# Altium PCB Main.PcbDoc
Units mm, origin at the board's own origin, x right, y up, seen from the top; angles counter-clockwise.
Board outline 16 x 14 mm, 2 copper layers (Top Layer, Bottom Layer); 6 components, 5 nets, 21 pads, 4 vias.
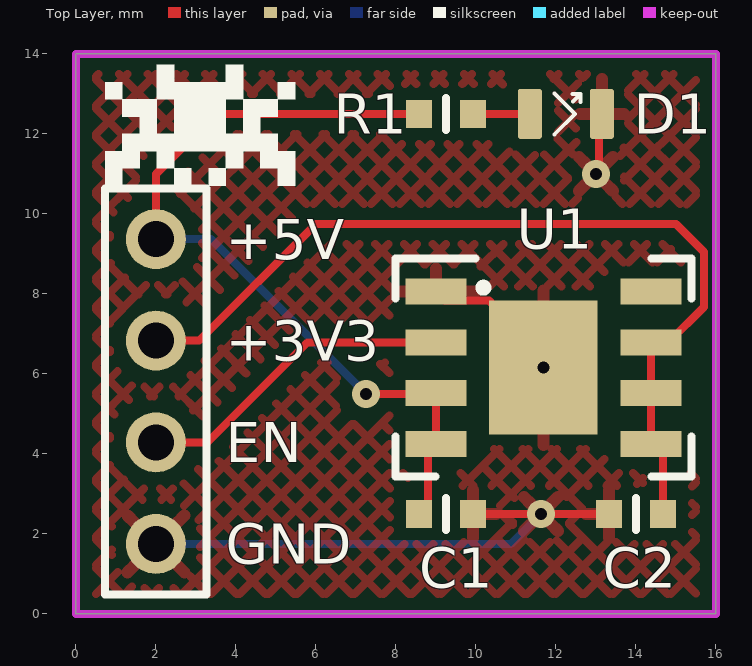
[diagram p0: Top Layer view]
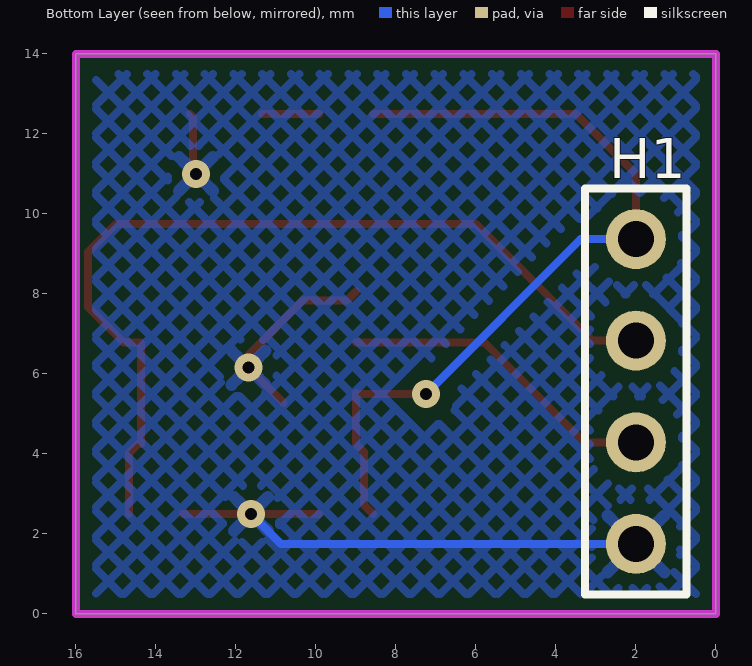
[diagram p1: Bottom Layer view, seen from below]
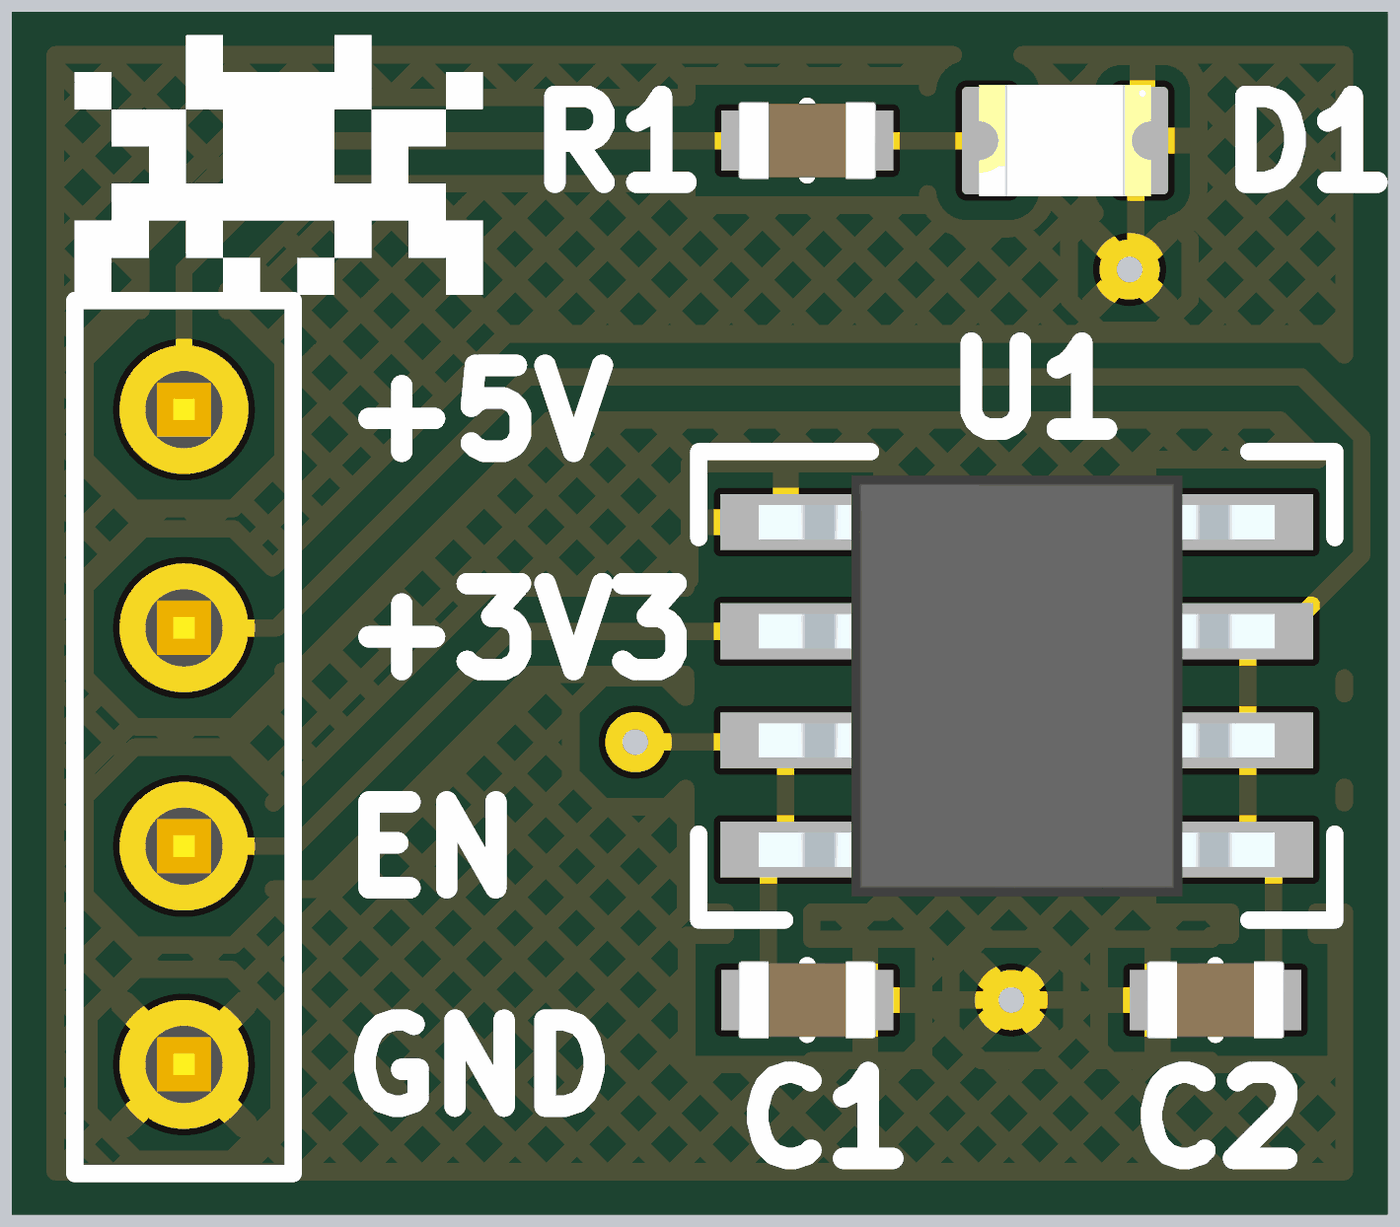
[diagram p2: 3D render of the assembled board from above, using the file's embedded part models]

## Layer stack, top to bottom
Top Solder: solder mask 0.0102, Solder Resist, Dk 3.5
Top Layer: signal copper 0.0356
Dielectric 1: dielectric 0.32, FR-4, Dk 4.8
Bottom Layer: signal copper 0.0356
Bottom Solder: solder mask 0.0102, Solder Resist, Dk 3.5

## Board outline
0,0 0,14 16,14 16,0

## Design rules (kind name [scope] priority, off if disabled: settings)
BoardOutlineClearance [All] p1: gap=0.2 ignorepadtopadclearanceinfootprint=FALSE
Clearance "inPolygon Clearance" [InPolygon] p1: gap=0.3 ignorepadtopadclearanceinfootprint=TRUE // this rule ensures that every net within a polygon of a different net has a set clearance from the poly
Clearance "Different Diff Pair" [All] p2: gap=0.2 ignorepadtopadclearanceinfootprint=TRUE
Clearance "Same Diff Pair" [All] p3: gap=0.1 ignorepadtopadclearanceinfootprint=TRUE
Clearance "Different Nets" [not InAnyDifferentialPair] p4: gap=0.3 ignorepadtopadclearanceinfootprint=TRUE except(0.1: Arc-SMDPad Arc-THPad Arc-Via Arc-Text Track-SMDPad Track-THPad Track-Via Track-Text SMDPad-Text THPad-Text Via-Text Fill-Text Poly-Text Region-Text Text-Text; 0.12: Arc-Arc Arc-Track Track-Track; 0.15: SMDPad-SMDPad SMDPad-THPad SMDPad-Via THPad-THPad THPad-Via Via-Via; 0.2: Arc-Hole Track-Hole SMDPad-Hole THPad-Hole Via-Hole Fill-Hole Poly-Hole Region-Hole Text-Hole)
Clearance "Same Net" [not InAnyDifferentialPair] p5: gap=0 ignorepadtopadclearanceinfootprint=TRUE except(0.1: THPad-Via; 0.18: Arc-Arc Arc-Track Track-Track)
ComponentClearance [All] p1: gap=0.102 collisioncheckmode=3 verticalgap=0.102 showdistances=TRUE
DiffPairsRouting "Ethernet Routing" [InDifferentialPairClass('Ethernet_Pairs')] p1: maxlimit=0.2 minlimit=0.2 mostfreqgap=0.2 toplayer_minwidth=0.25 toplayer_maxwidth=0.25 toplayer_prefwidth=0.25 bottomlayer_minwidth=0.25 bottomlayer_maxwidth=0.25 bottomlayer_prefwidth=0.25 impedanceprofiledriven=TRUE maxuncoupledlength=12.7
DiffPairsRouting "USB Routing" [InDifferentialPairClass('USB_Pairs')] p2: maxlimit=0.127 minlimit=0.127 mostfreqgap=0.127 toplayer_minwidth=0.23 toplayer_maxwidth=0.23 toplayer_prefwidth=0.23 bottomlayer_minwidth=0.23 bottomlayer_maxwidth=0.23 bottomlayer_prefwidth=0.23 impedanceprofiledriven=TRUE impedanceprofileid={F14BA31F-77FA-453E-8734-53F45B48A614} maxuncoupledlength=12.7
DiffPairsRouting "CAN Routing" [InDifferentialPairClass('CAN_Pairs')] p3: maxlimit=0.5 minlimit=0.5 mostfreqgap=0.5 toplayer_minwidth=0.201 toplayer_maxwidth=0.201 toplayer_prefwidth=0.201 bottomlayer_minwidth=0.201 bottomlayer_maxwidth=0.201 bottomlayer_prefwidth=0.201 impedanceprofiledriven=TRUE maxuncoupledlength=12.7
Height [All] p1: minheight=0 maxheight=1816.048 prefheight=12.7
HoleSize [All] p1: absolutevalues=TRUE maxlimit=6.3 minlimit=0.3 maxpercent=80.000 minpercent=20.000
HoleToHoleClearance [All] p1: gap=0.25 allowstackedmicrovias=FALSE
Length [All] p1: maxlimit=43.432 minlimit=0 usedelayunits=TRUE mindelay=0.000000 maxdelay=10000.000000
MatchedLengths "Diff Pair Matched Delays" [InDifferentialPairClass('Ethernet_Pairs') or InDifferentialPairClass('USB_Pairs') or InDifferentialPairClass('CAN_Pairs')] p1: tolerance=5 checknetsindiffpair=TRUE checkdiffpairvsdiffpair=FALSE checkxsignals=FALSE checkothers=FALSE usedelayunits=TRUE delaytolerance=100.000000
MinimumAnnularRing [All] p1: minimumring=0.2
MinimumSolderMaskSliver [All] p1: minsoldermaskwidth=0
PlaneClearance "Supply Net Clearance" [InNetClass('Supply_Nets')] p1: clearance=0.5
PlaneClearance "All Nets" [All] p2: clearance=0.3
PolygonConnect "Supply Nets" [InNetClass('Supply_Nets')] p1: connectstyle=Relief reliefconductorwidth=0.3 reliefentries=4 polygonreliefangle="90 Angle" conductorbypadedge=TRUE mindistance=0.381 enablemindistance=FALSE airgapwidth=0.254
PolygonConnect General [All] p2: connectstyle=Relief reliefconductorwidth=0.254 reliefentries=4 polygonreliefangle="90 Angle" airgapwidth=0.254
RoutingVias [All] p1: holewidth=0.2 width=0.35 viastyle="Through Hole" minholewidth=0.15 minwidth=0.3 maxholewidth=6.3 maxwidth=6.55
SilkToSilkClearance [All] p1: silktosilkclearance=0
SilkToSolderMaskClearance [All] p1: minsilkscreentomaskgap=0 clearancetoexposedcopper=TRUE
SolderMaskExpansion [All] p1: expansion=0.075 istentingtop=FALSE
SupplyNets "Schematic Supply Nets_3" [InNet('GND')] p1: voltage=0.000
SupplyNets "Schematic Supply Nets_2" [InNet('+5V')] p2: voltage=0.000
SupplyNets "Schematic Supply Nets_7" [InNet('+3V3')] p3: voltage=0.000
UnRoutedNet [All] p1: checkbadconnections=TRUE
Width "nRF Width" [InNetClass('nRF Signal')] p1: maxlimit=0.379 minlimit=0.379 preferedwidth=0.379 impedanceprofiledriven=TRUE minimp=50.000000 maximp=50.000000 favimp=50.000000 checkconnectedcopper=TRUE
Width [All] p2: maxlimit=100 minlimit=0.1 preferedwidth=0.3
20 further rules are at their usual default settings.

## Classes and differential pairs
net class Supply_Nets: +3V3 +5V EN GND

## Components (designator, comment, footprint, x,y, rotation, side; value= is the part's Value field where it differs from the comment)
C1 "[Cap] 0603 10uF 10% 10V" "[Cap] SMD 0603" 9.25,2.5 r180 top
C2 "[Cap] 0603 10uF 10% 10V" "[Cap] SMD 0603" 14,2.5 r0 top
D1 "[LED] SMD 0805 Green" "[LED] SMD 0805" 12.25,12.5 r0 top
H1 "1x4 Header" "[Header] 1x4 Male" 2,5.56 r270 bottom
R1 "[220] SMD 0603 1% 1/10W" "[Res] SMD 0603" 9.25,12.5 r0 top
U1 "3V3 1.5A" "[Linear] 3V3 1.5A" 11.688,6.155 r0 top

## Footprints (in the part's own frame and the unit in brackets; to place one, negate y for a bottom-side part, rotate by r counter-clockwise, add the part's x,y. Pads: shape width x height; smd on the part's side, far side on the other; paste and mask are expansions set on the pad)
"[Cap] SMD 0603" [mm]
  rect 0.65x0.7 smd: 1(-0.675,0) 2(0.675,0)
  silkscreen extent 0,-0.4 0,0.4, body extent -0.8,-0.45 0.8,0.45, height 0.8
"[Header] 1x4 Male" [mm] "2.54mm pitch"
  round 1.5 hole 0.9: 1(-3.81,0) 2(-1.27,0) 3(1.27,0) 4(3.81,0)
  silkscreen extent -5.08,-1.27 5.08,1.27, body extent -5.08,-1.27 5.08,1.27, height 9.5
"[LED] SMD 0805" [mm]
  rrect20% 0.6x1.25 smd: 1(-0.9,0) 2(0.9,0)
  silkscreen extent -0.28,-0.51 0.37,0.51, body extent -1,-0.65 1,0.65, height 0.8
"[Linear] 3V3 1.5A" [mm]
  rect 1.525x0.65 smd: 1(-2.688,1.905) 2(-2.688,0.635) 3(-2.688,-0.635) 4(-2.688,-1.905) 5(2.688,-1.905) 6(2.688,-0.635) 7(2.688,0.635) 8(2.688,1.905)
  rect 2.71x3.35 smd: 9(0,0)
  silkscreen extent -3.7,-2.73 3.7,2.73, body extent -3,-2.45 3,2.45, height 1.5
"[Res] SMD 0603" [mm]
  rect 0.65x0.7 smd: 1(-0.675,0) 2(0.675,0)
  silkscreen extent 0,-0.4 0,0.4, body extent -0.8,-0.45 0.8,0.45, height 0.8

## Part data
C1 C2: "CL10A106KP8NNNC", Capacitance=10uF, Max Voltage=10V, Size Package=0603, Supplier Part Number 1=1276-1192-6-ND, Tolerance=10%, Supplier 1=DigiKey
D1: "LG R971-KN-1-0-20-R18", Color=Green, Size Package=0805, Supplier Part Number 1=475-LGR971-KN-1CT-ND, Supplier 1=DigiKey
H1: library part "[Header] 1x4 Male", "2.54mm pitch"
R1: "CRGCQ0805F220R", Resistance=220, Size Package=0603, Supplier Part Number 1=A129741CT-ND, Tolerance=1%, Supplier 1=DigiKey, Wattage=1/8W
U1: library part "[Linear] 3V3 1.5A", "AP7362A-33SP-13", Supplier Part Number 1=AP7362A-33SP-13DICT-ND, Supplier 1=DigiKey

## Via types
v1: diameter 0.7, hole 0.3, Top Layer to Bottom Layer, 4 vias

## Nets (pads, with @x,y where several pads share a name; then routed paths per layer and width w, separated by ;. In a path a pad name is that pad's centre, name@x,y a point inside that pad or via, vN(x,y) a via of type N, cw(c..) or ccw(c..) an arc to the next point about the centre after c; other vN are vias at no path point)
+3V3: C2.2 H1.2 U1.5 U1.6 U1.7 | length 22.7
  Top Layer w0.2: H1.2 3.08,6.83 6,9.75 15,9.75 15.7,9.05 15.7,7.677 14.813,6.79 U1.7 U1.6 U1.5 14.45,4.25 14.675,4.025 C2.2
+5V: C1.2 H1.1 R1.1 U1.3 U1.4 | length 20.6
  Top Layer w0.2: H1.1 2,11 3.5,12.5 R1.1 ; v1(7.25,5.5) 8.98,5.5 U1.3 U1.4 8.8,4.05 8.8,2.725 C1.2
  Bottom Layer w0.2: H1.1 3.38,9.37 v1(7.25,5.5)
EN: H1.3 U1.2 | length 8
  Top Layer w0.2: H1.3 3.29,4.29 5.79,6.79 U1.2
GND: C1.1 C2.1 D1.2 H1.4 U1.1 U1.9 | length 19.8
  Top Layer w0.2: U1.1 9.225,7.835 10.328,7.835 11.688,6.475 v1(11.688,6.155) U1.9@10.811,5.278 ; C1.1 v1(11.625,2.5) C2.1 ; v1(13,11) 13.075,11.075 13.075,12.425 D1.2
  Bottom Layer w0.2: H1.4 10.875,1.75 v1(11.625,2.5)
NetD1_1: D1.1 R1.2 | length 1.4
  Top Layer w0.2: R1.2 D1.1
pads on no net: U1.8

## Polygon pours and split planes (outlines as drawn)
GND on Top Layer "GND Top" (hatched 45Degree grid 0.508 track 0.203, pour order 0): 0,0 16,0 16,14 0,14
GND on Bottom Layer "GND Bottom" (hatched 45Degree grid 0.508 track 0.203, pour order 1): 0,0 16,0 16,14 0,14

## Keep-outs
Keep-Out Layer:
  the board outline again, w0.2

## Silkscreen, mask and mechanical layers (free items; w line width, h text height)
Top Overlay:
  region: 2.616,10.705 2.455,10.705 2.455,11.136 2.886,11.136 2.886,10.705 2.616,10.705
  region: 0.727,13.174 0.727,13.295 1.159,13.295 1.159,12.864 0.727,12.864 0.727,13.174
  region: 5.045,12.997 5.045,13.295 5.046,13.295 5.477,13.295 5.477,12.864 5.045,12.864 5.045,12.996
  region: 3.75,11.102 3.75,10.705 3.318,10.705 3.318,11.136 3.319,11.136 3.75,11.136 3.75,11.103
  region: 2.03,13.727 2.455,13.727 2.455,13.295 3.75,13.295 3.75,13.727 4.182,13.727 4.182,12.864 3.75,12.864 3.75,12 4.182,12 4.182,12.864 5.045,12.864 5.045,12.432 4.614,12.432 4.614,12 5.045,12 5.045,11.999 5.045,11.568 5.477,11.568 5.477,10.705 5.045,10.705 5.045,11.136 4.614,11.136 4.614,11.137 4.614,11.568 4.182,11.568 4.182,11.137 4.181,11.137 4.181,11.136 3.75,11.136 3.75,11.568 2.455,11.568 2.455,11.136 2.023,11.136 2.023,11.137 2.023,11.568 1.591,11.568 1.591,11.137 1.59,11.137 1.59,11.136 1.159,11.136 1.159,10.705 0.727,10.705 0.727,11.568 1.159,11.568 1.159,11.999 1.16,11.999 1.16,12 1.591,12 1.591,12.432 1.16,12.432 1.159,12.432 1.159,12.864 2.023,12.864 2.023,12 2.455,12 2.455,12.864 2.023,12.864 2.023,13.727 2.03,13.727
  text "+5V" at 3.75,8.87 h1
  text "+3V3" at 3.75,6.33 h1
  text "EN" at 3.75,3.79 h1
  text "GND" at 3.75,1.25 h1